# Altium PCB TvsTester.PcbDoc
Units mil, origin at the board's own origin, x right, y up, seen from the top; angles counter-clockwise.
Board outline 1579.83 x 2485.35 mil, 2 copper layers (Top Layer, Bottom Layer), stack 61.855 mil thick; 42 components, 25 nets, 94 pads, 2 vias.
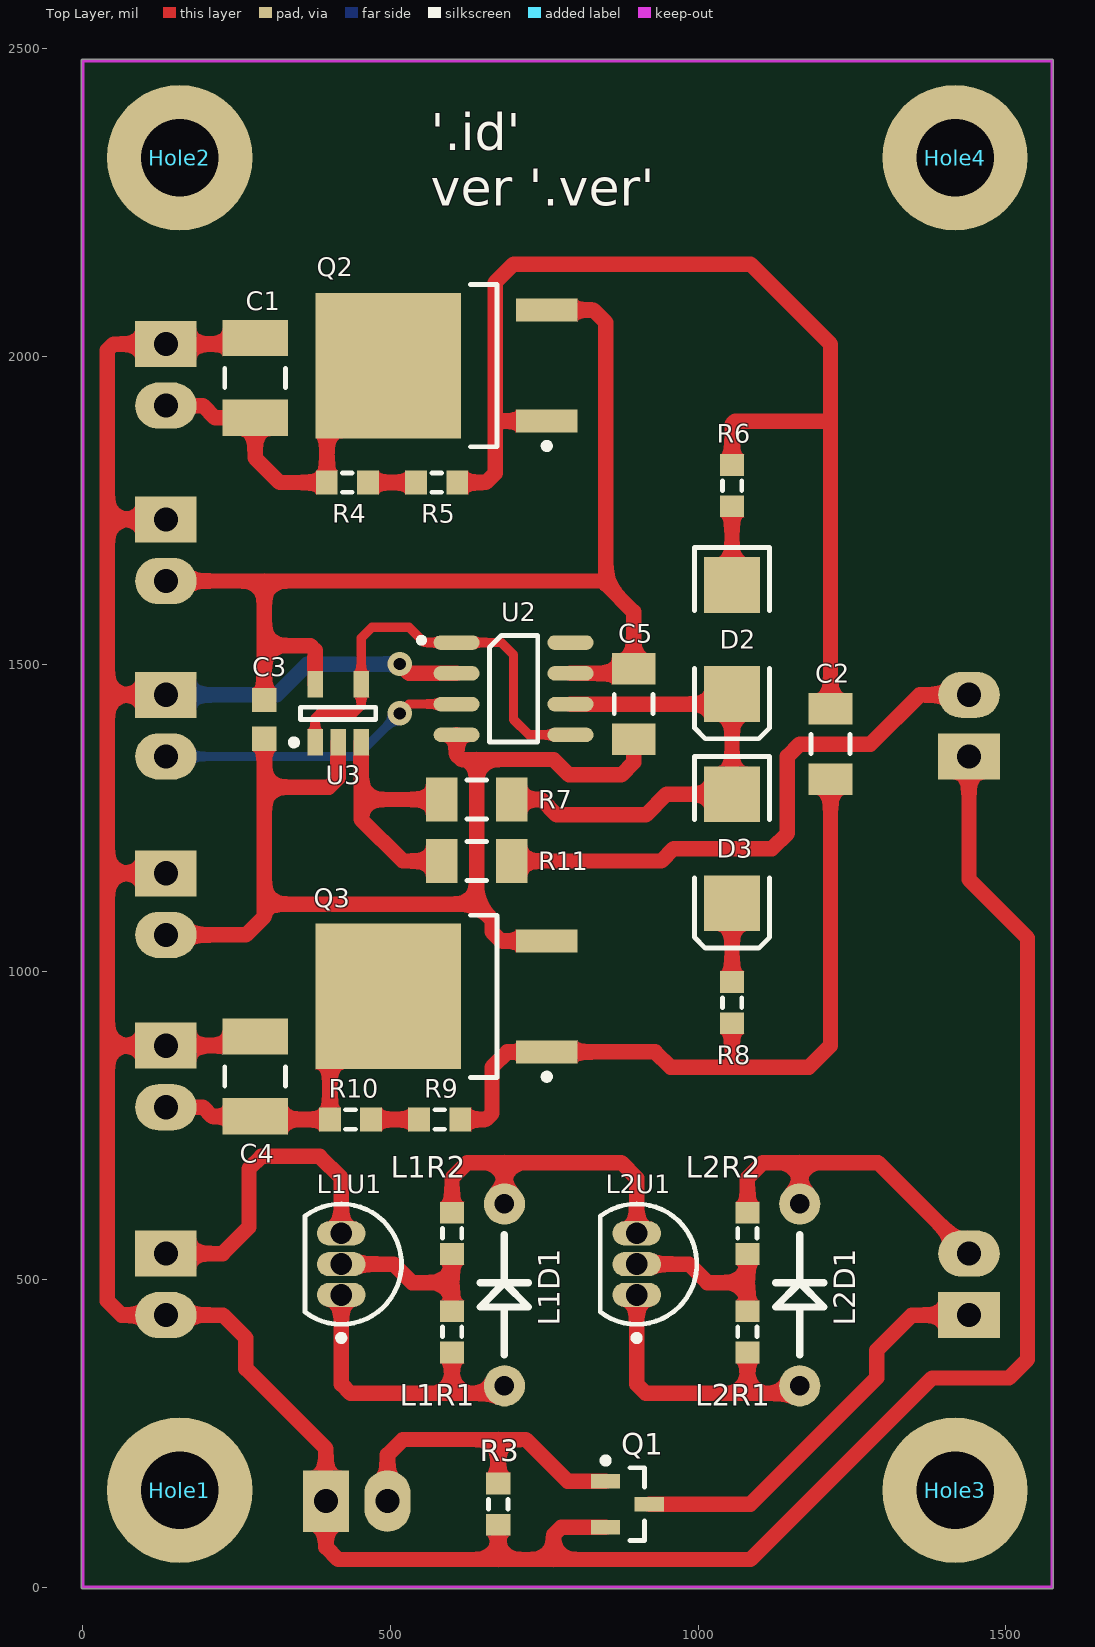
[diagram p0: Top Layer view]
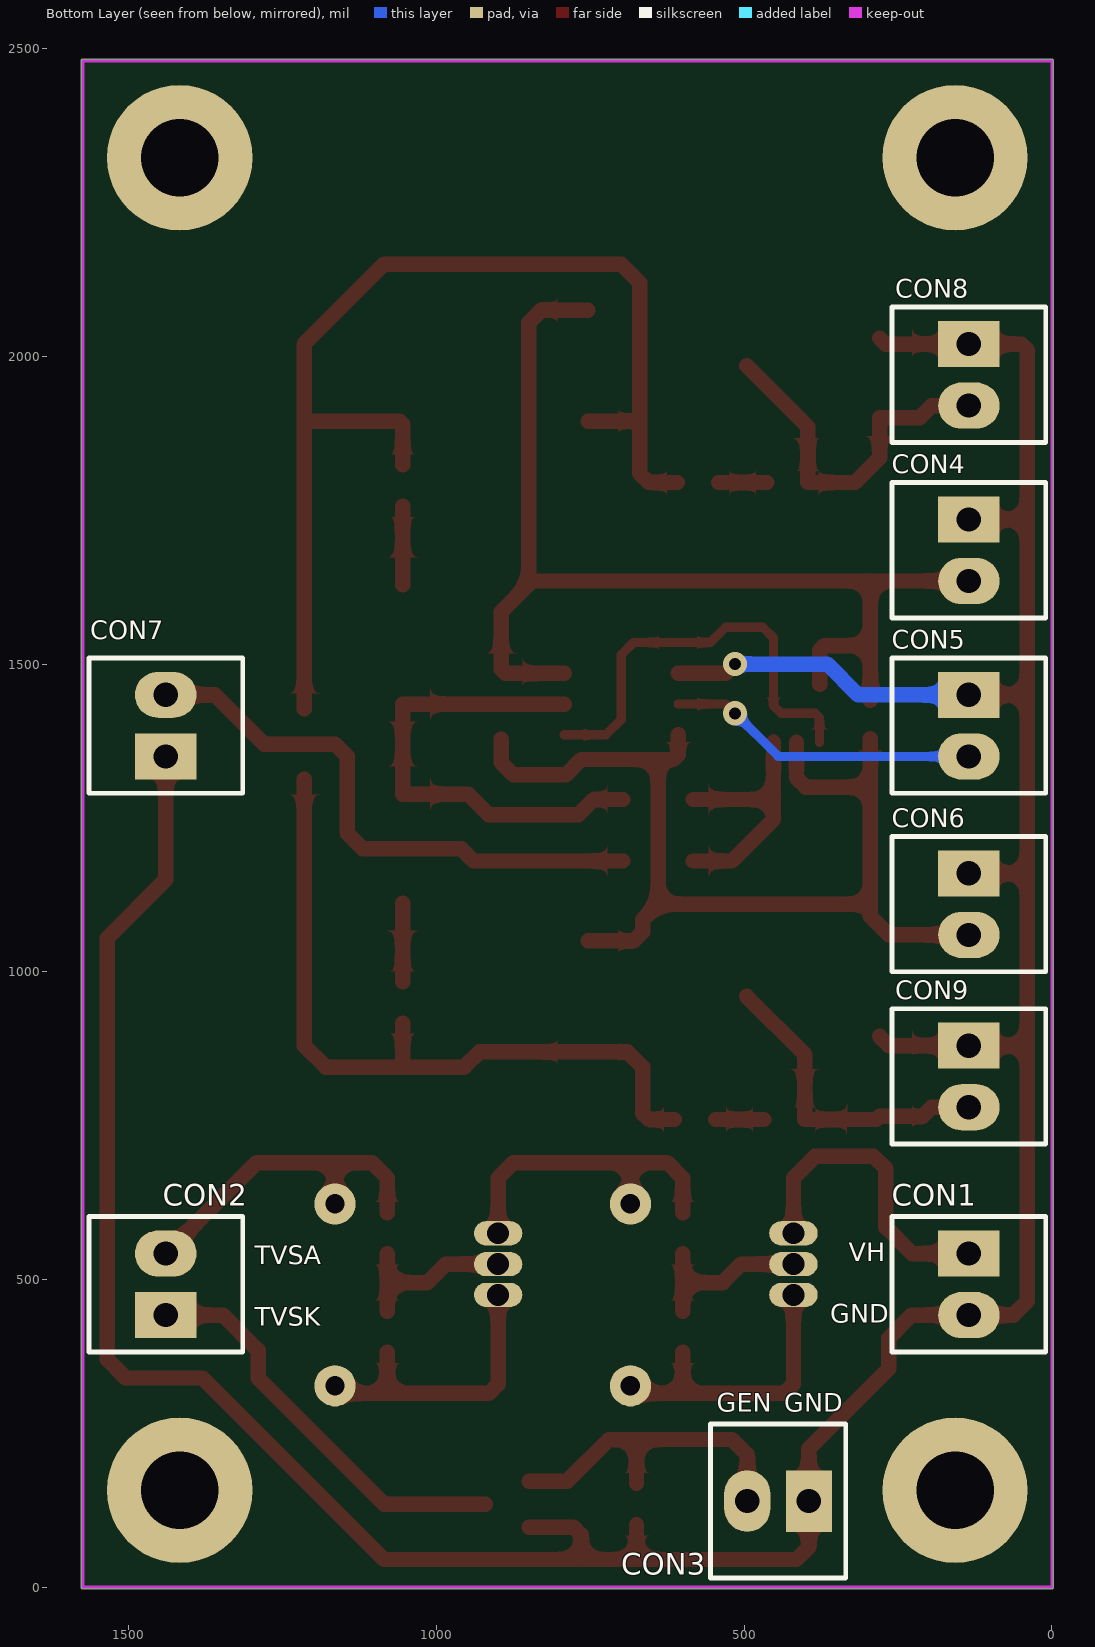
[diagram p1: Bottom Layer view, seen from below]
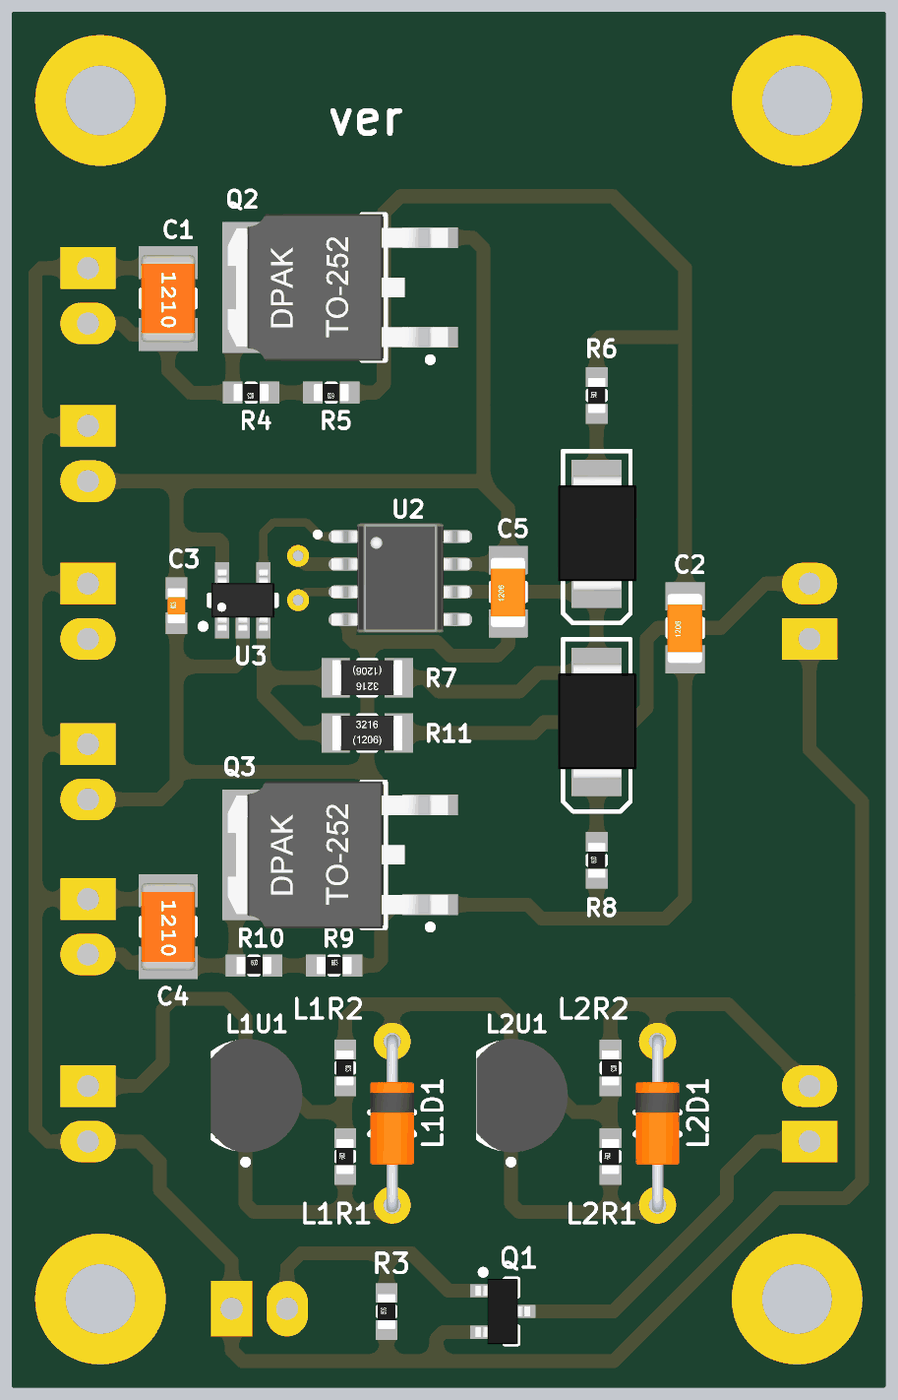
[diagram p2: 3D render of the assembled board from above, using the file's embedded part models]
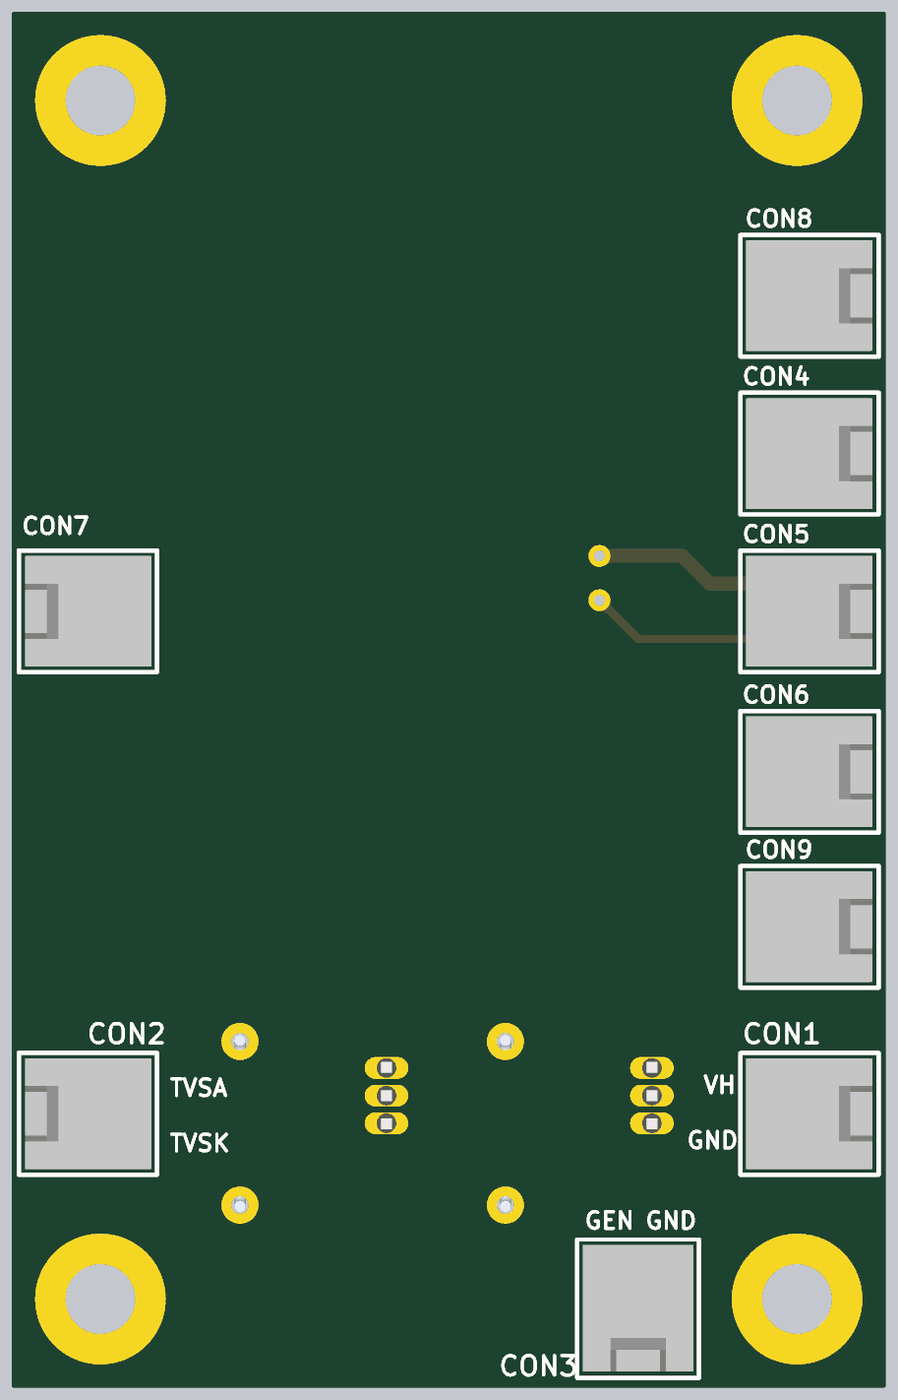
[diagram p3: 3D render of the assembled board from below, using the file's embedded part models]

## Layer stack, top to bottom
Top Solder: solder mask 0.4, Solder Resist, Dk 3.5
Top Layer: signal copper 1.4
Dielectric 1: dielectric 59.0551, FR-4, Dk 4.8
Bottom Layer: signal copper 1.4
Bottom Solder: solder mask 0.4, Solder Resist, Dk 3.5

## Board outline
-2.51,0 ccw(c0,0) 0,-2.52 1574.8,-2.52 ccw(c1574.8,0) 1577.32,0 1577.32,2480.31 ccw(c1574.8,2480.31) 1574.8,2482.83 0,2482.83 ccw(c0,2480.31) -2.51,2480.31

## Design rules (kind name [scope] priority, off if disabled: settings)
Clearance "Stitching GNDA" [IsStitchingVia and InNet('GNDA') vs (IsVia and (Not IsStitchingVia)) Or IsPad] p1: gap=5 ignorepadtopadclearanceinfootprint=FALSE except(0: Arc-Hole Track-Hole SMDPad-Hole THPad-Hole Via-Hole Fill-Hole Poly-Hole Region-Hole Text-Hole)
Clearance ShieldClearance_BOT [InNamedPolygon('GND_BOT') vs InNet('SHIELD')] p2: gap=30 ignorepadtopadclearanceinfootprint=FALSE except(0: Arc-Hole Track-Hole SMDPad-Hole THPad-Hole Via-Hole Fill-Hole Poly-Hole Region-Hole Text-Hole)
Clearance ANTClearance_TOP [InNamedPolygon('GND_TOP') vs InNetClass('50R')] p3: gap=13.78 ignorepadtopadclearanceinfootprint=FALSE
Clearance [All] p4: gap=7 ignorepadtopadclearanceinfootprint=TRUE except(10: Arc-Fill Arc-Poly Arc-Region Track-Fill Track-Poly Track-Region SMDPad-Fill SMDPad-Poly SMDPad-Region THPad-Fill THPad-Poly THPad-Region Via-Fill Via-Poly Via-Region Fill-Fill Fill-Poly Fill-Region Poly-Poly Poly-Region Region-Region)
DiffPairsRouting DIFF_USB [InDifferentialPair('USB')] p1: maxlimit=17.72 minlimit=7 mostfreqgap=7 toplayer_minwidth=10 toplayer_maxwidth=15.75 toplayer_prefwidth=12.99 bottomlayer_minwidth=10 bottomlayer_maxwidth=15.75 bottomlayer_prefwidth=12.99 maxuncoupledlength=500
Height [All] p1: minheight=0 maxheight=1200 prefheight=500
HoleSize [All] p1: absolutevalues=TRUE maxlimit=200 minlimit=1 maxpercent=80.000 minpercent=20.000
MatchedLengths DiffPair_100_2MatchedLengths [InNetClass('DIFF100_A')] p1: tolerance=1000 checknetsindiffpair=TRUE checkdiffpairvsdiffpair=FALSE checkxsignals=FALSE checkothers=FALSE
MatchedLengths DiffPair_100MatchedLengths [InNetClass('DIFF100_B')] p2: tolerance=5 checknetsindiffpair=TRUE checkdiffpairvsdiffpair=FALSE checkxsignals=FALSE checkothers=FALSE
MinimumSolderMaskSliver [All] p1: minsoldermaskwidth=1
PasteMaskExpansion [InNet('230V_N')] p1: expansion=20
PlaneClearance [All] p1: clearance=10
PlaneConnect Via_Thermal_Relief [IsStitchingVia Or IsVia] p1: planeconnectstyle=Direct reliefexpansion=20 reliefentries=4 reliefconductorwidth=10 reliefairgap=40
PlaneConnect ShieldConnect [InNet('SHIELD')] p2: planeconnectstyle=Relief reliefexpansion=20 reliefentries=4 reliefconductorwidth=10 reliefairgap=40
PlaneConnect [All] p3: planeconnectstyle=Relief reliefexpansion=8 reliefentries=4 reliefconductorwidth=8 reliefairgap=5
PolygonConnect GNDA_VIA_CONN [InNet('GND') And (IsStitchingVia Or IsVia)] p1: connectstyle=Direct reliefconductorwidth=10 reliefentries=4 polygonreliefangle="90 Angle" airgapwidth=10
PolygonConnect [All] p2: connectstyle=Relief reliefconductorwidth=10 reliefentries=4 polygonreliefangle="90 Angle" airgapwidth=10
RoomDefinition L2 [InComponentClass('L2')] p1: confinementstyle=ConfineIn formatcopy=TRUE lockcomponents=FALSE outline 800,288.46 1270,288.46 1270,715 800,715
RoomDefinition L1 [InComponentClass('L1')] p2: confinementstyle=ConfineIn formatcopy=TRUE lockcomponents=FALSE outline 320,288.46 790,288.46 790,715 320,715
RoutingVias [All] p1: holewidth=5.91 width=11.81 viastyle="Through Hole" minholewidth=5.91 minwidth=11.81 maxholewidth=500 maxwidth=1000
SilkToSilkClearance [All] p1: silktosilkclearance=5
SilkToSolderMaskClearance SilkscreenOverComponentPads [IsPad] p1: minsilkscreentomaskgap=1 clearancetoexposedcopper=TRUE
SolderMaskExpansion [InNet('230V_N')] p1: expansion=5
Width ANT [InNetClass('50R')] p1: maxlimit=23.43 minlimit=23.43 preferedwidth=23.43
Width GND [InNet('GND')] p2: maxlimit=100 minlimit=8 preferedwidth=50
Width 3V3 [InNet('3V3')] p3: maxlimit=40 minlimit=8 preferedwidth=30
Width 5V [InNet('5V')] p4: maxlimit=90 minlimit=10 preferedwidth=60
Width 24V [InNet('24V')] p5: maxlimit=80 minlimit=10 preferedwidth=60
Width [All] p6: maxlimit=100 minlimit=6 preferedwidth=8
21 further rules are at their usual default settings.

## Classes and differential pairs
channel class Lm234: L1 L2
component class TvsTester: C1 C2 C3 C4 C5 CON1 CON2 CON3 CON4 CON5 CON6 CON7 CON8 CON9 D2 D3 Hole1 Hole2 Hole3 Hole4 Q1 Q2 Q3 R3 R4 R5 R6 R7 R8 R9 R10 R11 U2 U3
component class L2: L2D1 L2R1 L2R2 L2U1
component class L1: L1D1 L1R1 L1R2 L1U1

## Components (designator, comment, footprint, x,y, rotation, side; value= is the part's Value field where it differs from the comment)
C1 "1uF" CAPC3225N 280,1965 r270 top
C2 "100nF" CAPC3216N 1215,1370 r90 top
C3 "100nF" CAPC1608N 295,1410 r90 top
C4 "1uF" CAPC3225N 280,830 r270 top
C5 "100nF" CAPC3216N 895,1435 r90 top
CON1 "MX-02227-2021" MX-02227-2021 135,492.13 r270 bottom
CON2 "MX-02227-2021" MX-02227-2021 1440,492.13 r90 bottom
CON3 "MX-02227-2021" MX-02227-2021 445,140 r0 bottom
CON4 "MX-02227-2021" MX-02227-2021 135,1685 r270 bottom
CON5 "MX-02227-2021" MX-02227-2021 135,1400 r270 bottom
CON6 "MX-02227-2021" MX-02227-2021 135,1110 r270 bottom
CON7 "MX-02227-2021" MX-02227-2021 1440,1400 r90 bottom
CON8 "MX-02227-2021" MX-02227-2021 135,1970 r270 bottom
CON9 "MX-02227-2021" MX-02227-2021 135,830 r270 bottom
D2 "S1KB-13-F" SMB 1055,1540 r270 top
D3 "S1KB-13-F" SMB 1055,1200 r270 top
Hole1 "Hole" HOLE-6/3.2 157.48,157.48 r0 top
Hole2 "Hole" HOLE-6/3.2 157.48,2322.83 r0 top locked
Hole3 "Hole" HOLE-6/3.2 1417.32,157.48 r0 top
Hole4 "Hole" HOLE-6/3.2 1417.32,2322.83 r0 top locked
L1D1 "1N457" DO-35 685,475 r270 top (schematic designator D1)
L1R1 "133R" RESC1608N 600,415 r90 top (schematic designator R1)
L1R2 "1k33" RESC1608N 600,575 r270 top (schematic designator R2)
L1U1 "LM234Z-6/NOPB" TO92 420,575 r270 top (schematic designator U1)
L2D1 "1N457" DO-35 1165,475 r270 top (schematic designator D1)
L2R1 "133R" RESC1608N 1080,415 r90 top (schematic designator R1)
L2R2 "1k33" RESC1608N 1080,575 r270 top (schematic designator R2)
L2U1 "LM234Z-6/NOPB" TO92 900,575 r270 top (schematic designator U1)
Q1 "BSS123" sot23-3l 885,135 r0 top
Q2 "MJD340" "DPAK_TO252 _1SIDE" 625,1985 r180 top
Q3 "MJD350" "DPAK_TO252 _1SIDE" 625,960 r180 top
R3 "10k" RESC1608N 675,135 r90 top
R4 "44k2" RESC1608N 430,1795 r180 top
R5 "44k2" RESC1608N 575,1795 r180 top
R6 "10k" RESC1608N 1055,1790 r90 top
R7 "100R" RESC3216N 640,1280 r0 top
R8 "10k" RESC1608N 1055,950 r90 top
R9 "44k2" RESC1608N 580,760 r0 top
R10 "44k2" RESC1608N 435,760 r0 top
R11 "0R" RESC3216N 640,1180 r180 top
U2 "INA149" SO-8_L 700,1460 r0 top
U3 "OPA140AIDBV" SOT23-5_N 415,1420 r90 top

## Footprints (in the part's own frame and the unit in brackets; to place one, negate y for a bottom-side part, rotate by r counter-clockwise, add the part's x,y. Pads: shape width x height; smd on the part's side, far side on the other; paste and mask are expansions set on the pad)
CAPC1608N [mm] "Chip Capacitor, Body 1.6x0.8mm, IPC Medium Density"
  rect 1x1 smd: 1(-0.8,0) 2(0.8,0)
  body extent -0.8,-0.4 0.8,0.4, height 0.3
CAPC3216N [mm] "Chip Capacitor, Body 3.2x1.6mm, IPC Medium Density"
  rect 1.3x1.8 smd: 1(-1.45,0) 2(1.45,0)
  silkscreen extent -0.4,-0.8 0.4,0.8, body extent -1.63,-0.79 1.57,0.81, height 1
CAPC3225N [mm] "Chip Capacitor, Body 3.2x2.5mm, IPC Medium Density"
  rect 1.5x2.7 smd: 1(-1.65,0) 2(1.65,0)
  silkscreen extent -0.4,-1.25 0.4,1.25, body extent -2,-1.24 2,1.24, height 1.7
DO-35 [mm] "Universal diode"
  round 1.7 hole 0.8: 1(-3.754,0) 2(3.754,0)
  silkscreen extent -2.48,-1 2.47,1, body extent -4.06,-1.01 4.08,1.01, height 2.21
"DPAK_TO252 _1SIDE" [mm]
  rect 2.55x0.95 smd: 1(-3.275,2.29) 3(-3.275,-2.29)
  rect 6x6 smd: 2(3.275,0)
  silkscreen extent -3.4,-3.35 -0.12,3.44, body extent -4.08,-3.37 6.02,3.37, height 2.37
HOLE-6/3.2 [mm]
  round 6 hole 3.2: 1(0,0)
MX-02227-2021 [mm]
  rect 1.905x2.54 hole 1: 1(-1.27,0)
  oval 1.905x2.54 hole 1: 2(1.27,0)
  silkscreen extent -2.79,-3.18 2.79,3.18, body extent -2.54,-2.92 2.54,2.88, height 11.7
RESC1608N [mm] "Chip Resistor, Body 1.6x0.8mm, IPC Medium Density"
  rect 0.9x1 smd: 1(-0.85,0) 2(0.85,0)
  silkscreen extent -0.2,-0.4 0.2,0.4, body extent -0.8,-0.4 0.8,0.4, height 0.3
RESC3216N [mm] "Chip Resistor, Body 3.2x1.6mm, IPC Medium Density"
  rect 1.3x1.8 smd: 1(-1.45,0) 2(1.45,0)
  silkscreen extent -0.4,-0.8 0.4,0.8, body extent -1.6,-0.8 1.6,0.8, height 0.55
SMB [mm] "DO-214-AA/SMB; 2 C-Bend Leads; Body 5.3 x 3.6 mm, inc. leads (LxW)"
  rect 2.3x2.3 smd: 1(-2.25,0) 2(2.25,0)
  silkscreen extent -3.8,-1.55 4.1,1.55, body extent -2.67,-1.77 2.63,1.83, height 2.4
SO-8_L [mm] "8-Pin Small Outline Integrated Circuit 1.27 mm Pitch, IPC High Density"
  oval 1.9x0.6 smd: 1(-2.35,1.905) 2(-2.35,0.635) 3(-2.35,-0.635) 4(-2.35,-1.905) 5(2.35,-1.905) 6(2.35,-0.635) 7(2.35,0.635) 8(2.35,1.905)
  silkscreen extent -3.9,-2.2 1,2.2, body extent -3.17,-2.5 3.17,2.5, height 1.88
sot23-3l [mm] "SOT23, 3-Leads, Body 2.9x1.3mm, Pitch 0.95mm, Lead Span 2.5mm, IPC High Density"
  rect 1.2x0.6 smd: 1(-0.9,0.95) 2(-0.9,-0.95) 3(0.9,0)
  silkscreen extent -1.02,-1.5 0.7,1.92, body extent -1.25,-1.5 1.25,1.5, height 1.05
SOT23-5_N [mm] "SOT23, 5-Leads, Body 2.9x1.6mm, Pitch 0.95mm, Lead Span 2.8mm, IPC Medium Density"
  rect 1.1x0.65 smd: 1(-1.2,0.95) 2(-1.2,0) 3(-1.2,-0.95) 4(1.2,-0.95) 5(1.2,0.95)
  silkscreen extent -1.32,-1.55 0.25,1.95, body extent -1.4,-1.45 1.4,1.45, height 1.45
TO92 [mm]
  oval 1x2 hole 0.9: 1(2.54,0) 2(1.27,0) 3(0,0)
  silkscreen extent -1.21,-1.5 4.44,2.48, body extent -1.34,-1.59 3.88,2.61, height 10

## Part data
C1 C4: library part Capacitor, "Capacitor", Tolerance=10%, Voltage=100V
C2 C5: library part Capacitor, "Capacitor", Tolerance=5%, Voltage=100V
C3: library part Capacitor, "Capacitor", Tolerance=5%, Voltage=50V
CON1 CON2 CON3 CON4 CON5 CON6 CON7 CON8 CON9: "Pith 2.54mm, 2-pin", ComponentLink1Description="Manufacturer Link", ComponentLink2Description=Datasheet, Distributor=tme.pl, tme.pl=MX-6410-03A
D2 D3: "Universal diode", manid=S1KB-13-F
Hole1 Hole2 Hole3 Hole4: library part HOLE_
L1D1 L2D1: library part 1N400X, "Universal diode", manid=1N457
L1R1 L1R2 L2R1 L2R2 R3 R4 R5 R6 R7 R8 R9 R10 R11: library part Resistor, "Resistor", Power=0W1, Tolerance=1%
L1U1 L2U1: "Three terminal adjustable current sources", manid=LM234Z-6/NOPB
Q2: "High voltage NPN power transistor", manid=MJD340
Q3: "High voltage PNP power transistor", manid=MJD350
U2: "High Common-Mode Voltage Difference Amplifier", manid=INA149
U3: library part OPA140, "1 MHz, Low-Power Op Amp", manid=OPA140AIDBV
Q1: manid=BSS123

## Via types
v1: diameter 39.37, hole 19.68, Top Layer to Bottom Layer, 2 vias

## Nets (pads, with @x,y where several pads share a name; then routed paths per layer and width w, separated by ;. In a path a pad name is that pad's centre, name@x,y a point inside that pad or via, vN(x,y) a via of type N, cw(c..) or ccw(c..) an arc to the next point about the centre after c; other vN are vias at no path point)
B1: C2.2 Q2.1 R5.1 R6.2 | length 1898.5
  Top Layer w25: R5.1 655,1795 670,1810 670,1885 ; Q2.1 679.84,1894.84 670,1885 ; R6.2 1055,1889.84 1060,1894.84 1214.84,1894.84 1215,1895 ; C2.2 1215,1895 ; 670,1885 670,2120 700,2150 1085,2150 1215,2020 1215,1895
B2: C2.1 Q3.1 R8.1 R9.2 | length 1222.3
  Top Layer w25: R9.2 655,760 665,770 665,845 689.84,869.84 Q3.1 930.16,869.84 955,845 1050,845 ; R8.1 1055,850 1050,845 ; C2.1 1215,880 1180,845 1050,845
GEN: CON3.2 Q1.1 R3.2 | length 539.5
  Top Layer w25: CON3.2 495,215 520,240 675,240 ; R3.2 675,240 ; Q1.1 787.6,172.4 720,240 675,240
GEN2: CON5.2 U2.3 | length 507.7
  Top Layer w15: v1(515,1420) 530,1435 U2.3
  Bottom Layer w15: CON5.2 445,1350 v1(515,1420)
GND: C1.1 C4.1 CON1.2 CON3.1 CON4.1 CON5.1 CON6.1 CON7.1 CON8.1 CON9.1 Q1.2 R3.1 U2.2 | length 5956.1
  Top Layer w25: CON6.1 40,1160 ; CON5.1 40,1450 ; CON4.1 40,1735 ; C4.1 265.04,880 CON9.1 40,880 ; C1.1 270.04,2020 CON8.1 50,2020 40,2010 40,1735 ; v1(515,1500) 530,1485 U2.2 ; R3.1 675,45 ; Q1.2 792.6,97.6 777.6,97.6 765,85 765,45 ; CON7.1 1440,1150 1535,1055 1535,370 1505,340 1380,340 1085,45 765,45 ; 40,880 40,1160 ; 40,880 40,465 62.87,442.13 CON1.2 227.87,442.13 265,405 265,355 395,225 CON3.1 395,65 415,45 675,45 ; 40,1160 40,1450 ; 40,1450 40,1735 ; 675,45 765,45
  Bottom Layer w25: CON5.1 315,1450 365,1500 v1(515,1500)
L1L2: L1D1.1 L1R2.1 L2U1.3 | length 534.5
  Top Layer w25: L1R2.1 600,665 625,690 685,690 ; L1D1.1 685,690 ; L2U1.3 900,665 875,690 685,690
NetCON7_2: CON7.2 R11.1 | length 928
  Top Layer w25: R11.1 940,1180 960,1200 1120,1200 1145,1225 1145,1350 1165,1370 1280,1370 1360,1450 CON7.2
NetD2_1: D2.1 R6.1 | length 128
  Top Layer w25: D2.1 R6.1
NetD2_2: D2.2 D3.1 R7.2 U2.6 | length 791.1
  Top Layer w25: R7.2 745,1280 770,1255 915,1255 948.58,1288.58 D3.1 1055,1435 U2.6
NetD3_2: D3.2 R8.2 | length 128
  Top Layer w25: R8.2 D3.2
NetL1D1_2: L1D1.2 L1R1.1 L1U1.1 | length 487.8
  Top Layer w25: L1U1.1 420,330 435,315 600,315 ; L1R1.1 600,315 ; L1D1.2 672.8,315 600,315
NetL1R1_2: L1R1.2 L1R2.2 L1U1.2 | length 285.5
  Top Layer w25: L1U1.2 505,525 535,495 600,495 ; L1R1.2 600,495 ; L1R2.2 600,495
NetL2D1_2: L2D1.2 L2R1.1 L2U1.1 | length 487.8
  Top Layer w25: L2U1.1 900,330 915,315 1080,315 ; L2R1.1 1080,315 ; L2D1.2 1152.8,315 1080,315
NetL2R1_2: L2R1.2 L2R2.2 L2U1.2 | length 285.5
  Top Layer w25: L2U1.2 985,525 1015,495 1080,495 ; L2R1.2 1080,495 ; L2R2.2 1080,495
NetR4_1: R4.1 R5.2 | length 78.1
  Top Layer w25: R4.1 R5.2
NetR7_1: R7.1 R11.2 U3.3 | length 414.2
  Top Layer w25: U3.3 452.4,1280 ; R11.2 520,1180 452.4,1247.6 452.4,1280 ; R7.1 452.4,1280
NetR9_1: R9.1 R10.2 | length 78.1
  Top Layer w25: R10.2 R9.1
NetU2_1: U2.1 U2.5 U3.1 U3.4 | length 714.3
  Top Layer w15: U3.1 377.6,1412.6 385,1420 440,1420 452.4,1432.4 U3.4 452.4,1542.4 470,1560 530,1560 555,1535 U2.1 680,1535 700,1515 700,1410 725,1385 U2.5
TVSA: CON2.2 L2D1.1 L2R2.1 | length 555.3
  Top Layer w25: L2R2.1 1080,665 1105,690 1165,690 ; L2D1.1 1165,690 ; CON2.2 1292.13,690 1165,690
TVSK: CON2.1 Q1.3 | length 673.1
  Top Layer w25: Q1.3 1085,135 1290,340 1290,385 1347.13,442.13 CON2.1
VCC: C1.2 CON8.2 Q2.2 R4.2 | length 582.6
  Top Layer w25: CON8.2 195,1920 214.96,1900.04 C1.2 280,1835 320,1795 R4.2 396.54,1885.47 Q2.2
VCC2: C3.2 C5.2 CON4.2 Q2.3 U2.7 U3.5 | length 1842.9
  Top Layer w25: CON4.2 295,1635 ; C3.2 295,1635 ; 295,1530 370,1530 377.6,1522.4 U3.5 ; Q2.3 829.84,2075.16 850,2055 850,1630 ; U2.7 887.91,1485 C5.2 895,1585 850,1630 ; 295,1635 845,1635 850,1630
VEE: C4.2 CON9.2 Q3.2 R10.1 | length 514
  Top Layer w25: CON9.2 195,780 209.96,765.04 C4.2 285.04,760 R10.1 401.54,865.47 Q3.2
VEE2: C3.1 C5.1 CON6.2 Q3.3 U2.4 U3.2 | length 1755
  Top Layer w25: CON6.2 265,1060 295,1090 295,1110 ; C3.1 295,1300 ; U3.2 415,1315 400,1300 295,1300 ; U2.4 607.48,1352.52 615,1345 640,1345 ; Q3.3 679.84,1050.16 665,1065 665,1085 640,1110 ; C5.1 895,1340 875,1320 790,1320 765,1345 640,1345 ; 295,1110 640,1110 ; 295,1110 295,1300 ; 640,1110 640,1345
VH: CON1.1 L1U1.3 | length 510.5
  Top Layer w25: CON1.1 227.13,542.13 270,585 270,680 290,700 385,700 420,665 L1U1.3
pads on no net: Hole1.1 Hole2.1 Hole3.1 Hole4.1 U2.8

## Keep-outs
Keep-Out Layer:
  lines w5: 0,0 0,2480.31 1574.8,2480.31 1574.8,0 0,0

## Silkscreen, mask and mechanical layers (free items; w line width, h text height)
Top Overlay:
  text "'.id' / ver '.ver'" at 565,2245 h60
Bottom Overlay:
  text "VH" at 330,530 h30
  text "TVSA" at 1295,525 h30
  text "GND" at 360,430 h30
  text "TVSK" at 1295,425 h30
  text "GND" at 435,285 h30
  text "GEN" at 545,285 h30